# Altium PCB SPDIF_I2S_SPDIF_04-20-23.PcbDoc (part 2 of 2)
Units mil, origin at the board's own origin, x right, y up, seen from the top; angles counter-clockwise.
Board outline 3987 x 3094 mil, 2 copper layers (Top Layer, Bottom Layer); 173 components, 89 nets, 568 pads, 369 vias.
Unrouted connection lines stored in the file: 53.
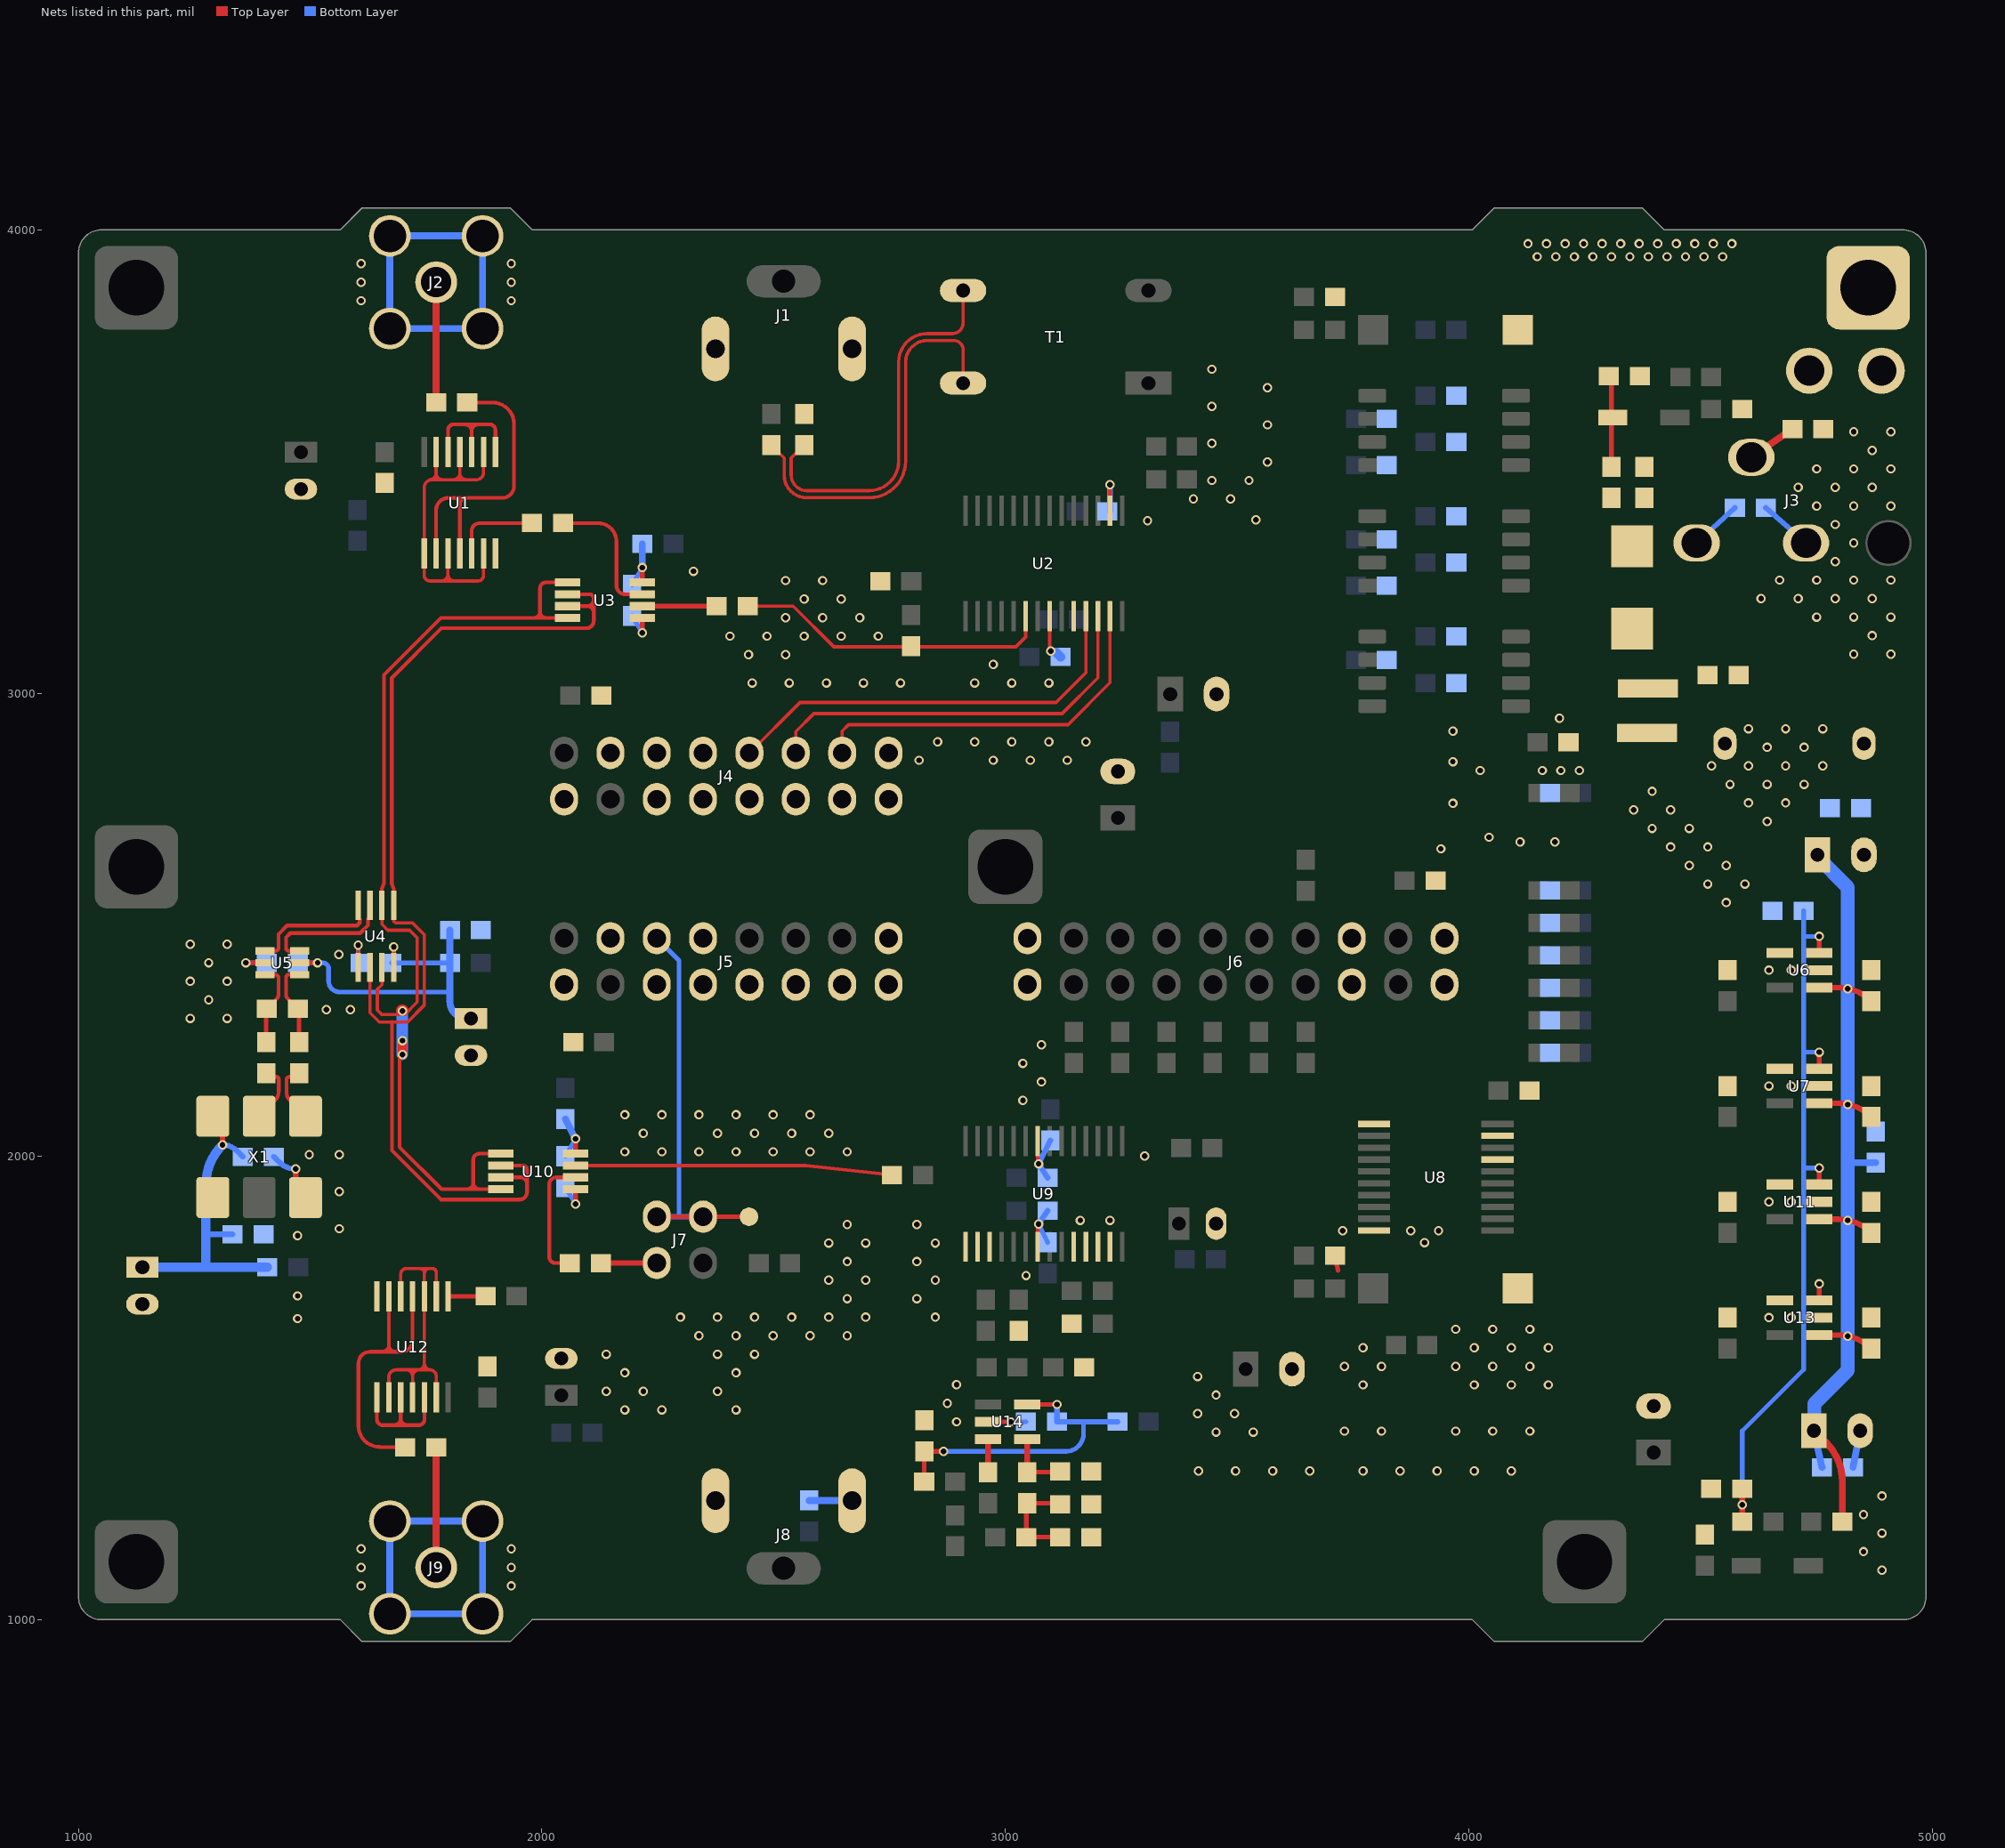
[diagram p2: the nets of this part, all layers, seen from the top]

## Via types
v1: diameter 20, hole 12, Top Layer to Bottom Layer, tented both sides, 364 vias
v2: diameter 20, hole 12, Top Layer to Bottom Layer, 5 vias

## Nets (pads, with @x,y where several pads share a name; then routed paths per layer and width w, separated by ;. In a path a pad name is that pad's centre, name@x,y a point inside that pad or via, vN(x,y) a via of type N, cw(c..) or ccw(c..) an arc to the next point about the centre after c; other vN are vias at no path point) (continued)
GND: "U1.7 GND" "U2.8 DGND" "U2.10 FMT1" "U2.16 DGND" "U3.5 GND" "U4.5 Vee" "U5.2 Vee" "U6.2 GND" "U7.2 GND" "U8.1 /OE_1" "U8.10 GND" "U8.17 2A4" "U8.19 /OE_2" "U9.1 RXP3" "U9.2 RXP2" "U9.3 RXP1" "U9.7 AGND" "U9.10 RXP4" "U9.11 RXP5" "U9.12 RXP6" "U9.13 RXP7" "U9.22 DGND" "U10.5 GND" "U11.2 GND" "U12.7 GND" "U13.2 GND" "U14.2 V-" "X1.3 GND" C1.2 C2.1 C3.2 C4.2 C5.1 C6.1 C8.1 C9.2 C10.1 C11.1 C12.2 C13.1 C14.2 C15.2 C16.1 C17.1 C18.1 C19.2 C20.1 C21.1 C22.1 C23.1 C24.2 C25.1 C26.1 C27.2 C28.2 C31.1 C32.1 C33.1 C34.2 C35.2 C36.1 C37.1 C38.2 C39.2 C40.1 C41.1 C42.1 C43.1 C45.1 C46.1 C47.1 C48.1 C49.1 C50.1 C51.1 C52.2 C53.1 C54.1 C55.1 C56.1 C57.1 C58.1 C59.1 C60.1 C61.1 C62.1 C63.1 J1.2 J1.3 J2.2 J3.2 J4.1 J4.4 J4.5 J4.6 J4.7 J4.8 J4.9 J4.11 J4.13 J4.15 J4.16 J5.1 J5.4 J5.5 J5.7 J5.8 J5.9 J5.11 J5.13 J5.15 J5.16 J6.1 J6.2 J6.15 J6.16 J6.19 J6.20 J8.2 J8.3 J9.2 pad.0@4862,3875 pad.1 R3.1 R5.1 R26.2 R36.1 R38.1 R40.1 R41.1 R42.1 R43.1 R44.1 R45.1 R46.1 R47.1 R48.1 R49.1 R50.1 R51.1 R52.1 R53.1 R54.1 R55.1 R56.1 R57.1 R58.1 SW1.2 SW2.2 | length 2920.8
  Top Layer w8: 1603.63,2401.1 1603.63,2408.1 v1(1603.63,2456.2) ; 3070,1805 v2@3070,1854 ; v2@3070,1984 3070,2033 ; v1@3096,3092 3096,3166 ; 3226,3394 v1(3226,3450)
  Top Layer w10: v1(1361,2418) 1402.6,2418 ; v1(2072.71,1897.18) 2072.71,1929.2 ; v1(2216.71,3130.18) 2216.71,3162.2 ; 2962.68,1427.29 v1(3012,1427.29) ; C28.2@3711.47,1786 3718,1754
  Top Layer w12: 1469,1911.32 v1(1469,1973)
  Bottom Layer w10: v1(1361,2418) C52.2@1406.54,2418 ; C53.1@1603.63,2417.66 v1(1603.63,2456.2) ; C57.1@2051,1933.54 v1(2072.71,1897.18) ; C47.1@2195,3166.53 v1(2216.71,3130.18) ; v1(3012,1427.29) C62.1@3044.53,1427.29 ; v2(3072,1854) C61.1@3091.47,1814.46
  Bottom Layer w12: C56.1@1421.46,1999.46 1433.03,1987.9 ccw(c1469,2023.87) v1(1469,1973) ; v2(3072,1854) C59.1@3091.47,1883 ; C58.1@3091.47,1954 v2(3072,1984) C54.1@3097.47,2034.54 ; C46.1@3226,3392 v1(3226,3450) ; C45.1@4641.47,3400 J3.2@4728,3324
  Bottom Layer w15: R58.1@2577,1257.46 J8.3@2669.03,1257.46 ; C63.1@4829.47,1329 C39.2@4845,1408 ; J9.2@1672,1013 J9.2@1672,1213 J9.2@1872,1213 J9.2@1872,1013 J9.2@1672,1013 ; J2.2@1672,3787 J2.2@1672,3987 J2.2@1872,3987 J2.2@1872,3787 J2.2@1672,3787
  Bottom Layer w20: C48.1@3109.78,3087.68 C48.1@3119.47,3078
  other v1: 1610,1073 1934,1073 4892,1107 1610,1113 1934,1113 4852,1147 1610,1153 1934,1153 4892,1187 4852,1227 4892,1267 3417,1321 3497,1321 3577,1321 3657,1321 3772,1321 3852,1321 3932,1321 4012,1321 4092,1321 3455,1405 3535,1405 3732,1407 3812,1407 3972,1407 4052,1407 4132,1407 2895,1427.29 3415,1445 3495,1445 2179,1453 2259,1453 2419,1453 2875,1467.29 3455,1485 2139,1493 2219,1493 2379,1493 2895,1507.29 3772,1507 4012,1507 4092,1507 4172,1507 3415,1525 2179,1533 2419,1533 3732,1547 3812,1547 3972,1547 4052,1547 4132,1547 2139,1573 2379,1573 2459,1573 3772,1587 4012,1587 4092,1587 4172,1587 2339,1613 2419,1613 2499,1613 2579,1613 2659,1613 3972,1627 4052,1627 4132,1627 1473,1650 4648,1652 4696,1652 2299,1653 2379,1653 2459,1653 2539,1653 2619,1653 2699,1653 2849,1653 2659,1693 2809,1693 1473,1699 2619,1733 2699,1733 2849,1733 3045,1743 2659,1773 2809,1773 2619,1813 2699,1813 2849,1813 3905,1814 1473,1829 3728,1839.84 3875,1839.84 3935,1839.84 1563,1844 2659,1853 2809,1853 3162,1862 3226,1862 4648,1902 4696,1902 1563,1924 3301,2001 1498,2004 1563,2004 2179,2010 2259,2010 2339,2010 2419,2010 2499,2010 2579,2010 2659,2010 2219,2050 2379,2050 2459,2050 2539,2050 2619,2050 2179,2090 2259,2090 2339,2090 2419,2090 2499,2090 2579,2090 3038,2121 4648,2152 4696,2152 3078,2161 3038,2201 3078,2241 1241,2298 1321,2298 1535,2317 1587,2317 1281,2338 1241,2378 1321,2378 4648,2402 4696,2402 1281,2418 1562,2436 1241,2458 1321,2458 4556,2548 4516,2588 4596,2588 4476,2628 4556,2628 3940,2664 4436,2668 4516,2668 4111,2679 4186,2679 4044,2689 4396,2708 4476,2708 4356,2748 4436,2748 3966,2762 4396,2788 4025,2833 4159,2833 4199,2833 4239,2833 3966,2852 2814,2855 2974,2855 3054,2855 3134,2855 2854,2895 2934,2895 3014,2895 3094,2895 3174,2895 3966,2918 4196,2946 2454,3022 2534,3022 2614,3022 2694,3022 2774,3022 2934,3022 3014,3022 3094,3022 2974,3062 2446,3083 2526,3083 4831,3084 4911,3084 3098,3091 2406,3123 2486,3123 2566,3123 2646,3123 2726,3123 4871,3124 2526,3163 2606,3163 2686,3163 4751,3164 4831,3164 4911,3164 2566,3203 2646,3203 4631,3204 4711,3204 4791,3204 4871,3204 2526,3243 2606,3243 4671,3244 4751,3244 4831,3244 4911,3244 2327,3263 4791,3284 4831,3324 4791,3364 3307,3372 3541,3374 4751,3404 4831,3404 4911,3404 3406,3419 3486,3419 4711,3444 4791,3444 4871,3444 3446,3459 3526,3459 4751,3484 4831,3484 4911,3484 3566,3499 4871,3524 3446,3539 4831,3564 4911,3564 3566,3579 3446,3619 3566,3659 3446,3699 1610,3847 1934,3847 1610,3887 1934,3887 1610,3927 1934,3927 4148,3942 4188,3942 4228,3942 4268,3942 4308,3942 4348,3942 4388,3942 4428,3942 4468,3942 4508,3942 4548,3942 4128,3970 4168,3970 4208,3970 4248,3970 4288,3970 4328,3970 4368,3970 4408,3970 4448,3970 4488,3970 4528,3970 4568,3970
I2C_SCL: 
I2C_SDA: 
I2S_BCLK: 
I2S_Data: 
I2S_RCVR_BCLK: 
I2S_RCVR_DATA: 
I2S_RCVR_LRCK: 
I2S_WCLK: 
I2S_XMTR_BCLK: "U2.11 SCLK" J4.10 | length 919.7
  Top Layer w7: J4.10@2448,2871 2557,2980 3110,2980 3174,3044 3174,3166
I2S_XMTR_DATA: "U2.13 DATA" J4.14 | length 811.8
  Top Layer w7: J4.14@2648,2871 2648,2918 2662,2932 3135.54,2932 3226,3022.46 3226,3166
I2S_XMTR_LRCK: "U2.12 SYNC" J4.12 | length 878.9
  Top Layer w7: J4.12@2548,2871 2548,2917 2587,2956 3122.77,2956 3200,3033.23 3200,3166
LMV_3V3: "U14.5 V+" C40.2 C62.2 L5.2 R30.1 | length 689.2
  Top Layer w10: R30.1@2825.07,1298 C40.2@2825.07,1363.3 v1(2867,1363.3) ; 3047.32,1464.69 v1(3111.47,1464.69)
  Bottom Layer w10: v1(2867,1363.3) 3130.86,1363.3 ccw(c3130.86,1401.45) 3169,1401.45 3169,1427
  Bottom Layer w12: v1(3111.47,1464.69) C62.2@3111.47,1427.29 3169,1427.29 L5.2@3242.53,1427.29
LMV_Offset: "U14.4 In-" C41.2 R32.2 | length 142.6
  Top Layer w10: R32.2@3047.32,1318.46 C41.2@3118.53,1318.46
  Top Layer w12: R32.2@3047.32,1318.46 3047.32,1389.89
LMV_OffsetFilter: C43.2 R32.1 R37.1 R38.2 | length 217.5
  Top Layer w10: R32.1@3045.47,1251.54 R37.1@3045.47,1178.32 R38.2@3118.53,1178.32 ; R32.1@3047.32,1251.54 C43.2@3118.53,1251.54
LMV_Sig_In: "U14.3 In+" R31.2 | length 70.4
  Top Layer w12: R31.2@2962.68,1319.46 2962.68,1389.89
LVDS_3V3: "U3.8 Vcc" "U10.8 Vcc" C47.2 C57.2 L7.2 L9.2 | length 249.5
  Top Layer w10: 2072.71,2005.98 v1(2072.71,2038) ; 2216.71,3238.98 v1(2216.71,3271)
  Bottom Layer w10: C57.2@2051,2000.46 v1(2072.71,2038) ; C47.2@2195,3233.47 v1(2216.71,3271)
  Bottom Layer w15: L9.2@2051,2080.53 v1(2072.71,2038) ; v1(2216.71,3271) L7.2@2216.71,3322
MCLK: "U2.6 MCLK" "U3.6 Q1" "U10.7 Q0" J5.6 J7.1 J7.3 pad.2 R9.1 R9.2 R10.1 R21.1 | length 2454.2
  Top Layer w7: R9.2@2444.47,3187.8 2542.2,3187.8 2630,3100 3023,3100 3044,3121 3044,3166
  Top Layer w8: 2072.71,1980.39 2569.61,1980.39 R21.1@2755.53,1960
  Top Layer w10: 2216.71,3187.8 R9.1@2377.53,3187.8 ; J7.3@2248,1870 J7.1@2348,1870 pad.2@2447,1870
  Bottom Layer w10: J5.6@2248,2471 2296,2423 2296,1870
  Bottom Layer w12: J7.3@2248,1870 2296,1870 J7.1@2348,1870
MCLK_LVDS_H: "U3.1 D0" "U3.4 D1" "U4.2 /D" "U4.7 Q" "U10.1 D0" "U10.4 D1" | length 2371.2
  Top Layer w7: 1654.79,2408.1 1654.79,2370.79 1645,2361 1645,2316 1655,2306 1704,2306 1731,2333 1731,2472 1714.79,2488.21 1667.79,2488.21 1654.79,2501.21 1654.79,2541.9
  Top Layer w8: 1654.79,2541.9 1654.79,2577 1659.5,2590 1659.5,3039.5 1782.2,3162.2 1982.2,3162.2 ; v1@1693,2251 1693,2020 1783.8,1929.2 1911.29,1929.2 ; 1838.2,1929.2 ccw(c1838.2,1943) 1852,1943 ccw(c1865.8,1943) 1865.8,1929.2 ; 1852,1929.2 1852,1993.11 cw(c1864.87,1993.11) 1864.87,2005.98 1911.29,2005.98 ; 2055.29,3162.2 2009.8,3162.2 ; 2055.29,3238.98 2008.87,3238.98 ccw(c2008.87,3226.11) 1996,3226.11 1996,3162.2 ; 1982.2,3162.2 ccw(c1982.2,3176) 1996,3176 ccw(c2009.8,3176) 2009.8,3162.2 ; 1982.2,3162.2 1996,3162.2 ; 1996,3162.2 2009.8,3162.2
  Top Layer w20: v1(1699,2220) v1(1699,2250)
  Top Layer w25: v1@1698,2315 v1@1700,2315
  Bottom Layer w25: v1(1699,2220) v1(1699,2314)
MCLK_LVDS_L: "U3.2 /D0" "U3.3 /D1" "U4.1 D" "U4.6 /Q" "U10.2 /D0" "U10.3 /D1" | length 2525.5
  Top Layer w7: 1629.21,2408.1 1629.21,2310.05 1649.05,2290.21 1710.21,2290.21 1746,2326 1746,2479 1721,2504 1684,2504 1680.38,2507.62 1680.38,2541.9
  Top Layer w8: 1676.41,2290 1676.41,2013.13 1782.54,1907 1952,1907 ccw(c1952,1923) 1968,1923 1968,1971.18 ccw(c1958.8,1971.18) 1958.8,1980.39 1911.29,1980.39 ; 1680.38,2541.9 1680.38,2577 1676.09,2590 1676.09,3032.63 1783.46,3140 2096,3140 ccw(c2096,3156) 2112,3156 2112,3204.18 ccw(c2102.8,3204.18) 2102.8,3213.39 2055.29,3213.39 ; 1911.29,1954.8 1968,1954.8 ; 1967.8,1941 ccw(c1954,1941) 1954,1954.8 ccw(c1954,1968.59) 1967.8,1968.59 ; 2055.29,3187.8 2112,3187.8 ; 2111.8,3174 ccw(c2098,3174) 2098,3187.8 ccw(c2098,3201.59) 2111.8,3201.59
MCLK_Out_Buffer: "U1.1 1A" "U1.3 2A" "U1.6 3Y" "U1.9 4A" "U1.11 5A" "U1.13 6A" "U12.2 1Y" "U12.3 2A" "U12.5 3A" "U12.9 4A" "U12.11 5A" "U12.13 6A" | length 1670.8
  Top Layer w7: 1669.82,1479.75 1669.82,1523.58 cw(c1685.74,1523.58) 1685.74,1539.5 1758.18,1539.5 ; 1695.41,1698.25 1695.41,1745.82 cw(c1707.59,1745.82) 1707.59,1758 1763.93,1758 cw(c1763.93,1749.75) 1772.18,1749.75 1772.18,1698.25 ; 1707.2,1539.3 cw(c1707.2,1525.5) 1721,1525.5 cw(c1734.8,1525.5) 1734.8,1539.3 ; 1721,1479.75 1721,1539.5 ; 1732.8,1539.2 ccw(c1732.8,1553) 1746.59,1553 ccw(c1760.39,1553) 1760.39,1539.2 ; 1736.59,1758 cw(c1736.59,1748) 1746.59,1748 cw(c1756.59,1748) 1756.59,1758 ; 1746.59,1540 1746.59,1698.25 1746.59,1758 ; 1758.02,3460.7 ccw(c1758.02,3474.5) 1771.82,3474.5 ccw(c1785.61,3474.5) 1785.61,3460.7 ; 1758.39,1539.3 cw(c1758.39,1525.5) 1772.18,1525.5 1772.18,1479.75 ; 1771.82,3460.5 1771.82,3520.25 ; 1783.61,3242.2 ccw(c1783.61,3256) 1797.41,3256 ccw(c1811.2,3256) 1811.2,3242.2 ; 1797.41,3242 1797.41,3301.75 ; 1809.2,3460.7 ccw(c1809.2,3474.5) 1823,3474.5 ccw(c1836.8,3474.5) 1836.8,3460.7 ; 1823,3460.5 1823,3520.25 ; 1874.18,3301.75 1874.18,3254.18 cw(c1862,3254.18) 1862,3242 1758.41,3242 cw(c1758.41,3254.18) 1746.23,3254.18 1746.23,3301.75 1746.23,3444 cw(c1762.73,3444) 1762.73,3460.5 1858.26,3460.5 ccw(c1858.26,3476.42) 1874.18,3476.42 1874.18,3520.25
MCLK_Output: "U1.5 3A" "U3.7 Q0" "U10.6 Q1" "U12.1 1A" J7.4 R8.1 R8.2 R22.1 R22.2 R25.1 | length 962.8
  Top Layer w8: 1848.59,3301.75 1848.59,3349.59 cw(c1866,3349.59) 1866,3367 R8.1@1978.54,3367 ; R8.2@2045.46,3367 2121,3367 cw(c2121,3327) 2161,3327 2161,3232 ccw(c2179.61,3232) 2179.61,3213.39 2216.71,3213.39 ; R22.2@2060.53,1770 2029,1770 cw(c2029,1783) 2016,1783 2016,1940 cw(c2030.8,1940) 2030.8,1954.8 2072.71,1954.8
  Top Layer w10: 1797.77,1698.25 R25.1@1878.54,1698.25
  Top Layer w12: R22.1@2127.47,1770 J7.4@2248,1770
MCLK_SMA_Out: "U1.2 1Y" "U1.4 2Y" "U1.8 4Y" "U1.10 5Y" "U1.12 6Y" "U12.4 2Y" "U12.6 3Y" "U12.8 4Y" "U12.10 5Y" "U12.12 6Y" J2.1 J9.1 R2.1 R2.2 R29.1 R29.2 | length 2520.5
  Top Layer w7: 1656.02,1579.2 ccw(c1656.02,1593) 1669.82,1593 ccw(c1683.61,1593) 1683.61,1579.2
  Top Layer w8: 1644.23,1479.75 1644.23,1432.18 ccw(c1656.41,1432.18) 1656.41,1420 1734.41,1420 ccw(c1734.41,1432.18) 1746.59,1432.18 1746.59,1479.75 ; 1669.82,1578.5 1669.82,1698.25 ; 1681.61,1420.2 ccw(c1681.61,1434) 1695.41,1434 ccw(c1709.2,1434) 1709.2,1420.2 ; 1695.41,1420 1695.41,1479.75 ; R29.2@1705.07,1372.2 1650,1373 cw(c1650,1418.77) 1604.23,1418.77 1604.23,1553.38 cw(c1629.35,1553.38) 1629.35,1578.5 1698,1578.5 ccw(c1698,1601.5) 1721,1601.5 1721,1698.25 ; 1771.82,3301.75 1771.82,3394.9 cw(c1798.42,3394.9) 1798.42,3421.5 1914.65,3421.5 ccw(c1914.65,3446.62) 1939.77,3446.62 1939.77,3581.23 ccw(c1894,3581.23) 1894,3627 R2.2@1839.73,3627 ; 1797.41,3520.25 1797.41,3567.82 cw(c1809.59,3567.82) 1809.59,3580 1887.59,3580 cw(c1887.59,3567.82) 1899.77,3567.82 1899.77,3520.25 ; 1809.21,3421.29 cw(c1809.21,3407.5) 1823,3407.5 cw(c1836.8,3407.5) 1836.8,3421.29 ; 1823,3301.75 1823,3421.5 ; 1834.8,3579.8 cw(c1834.8,3566) 1848.59,3566 cw(c1862.39,3566) 1862.39,3579.8 ; 1848.59,3520.25 1848.59,3580
  Top Layer w15: J9.1@1772,1113 R29.1@1772,1372.2 ; R2.1@1772,3627.8 J2.1@1772,3880
MIC_Enable: "U6.3 EN" "U7.3 EN" "U11.3 EN" "U13.3 EN" C42.2 C50.2 R34.1 | length 1649.8
  Top Layer w10: 4756.32,1689.4 v1(4756.32,1725) ; 4756.32,1939.4 v1(4756.32,1975) ; 4756.32,2189.4 v1(4756.32,2225) ; 4756.32,2439.4 v1(4756.32,2475)
  Top Layer w12: R34.1@4590.53,1212 C42.2@4590.53,1282.54
  Bottom Layer w10: v1(4590.53,1248) 4590.53,1407.54 4723,1540 C50.2@4723,2530 ; 4723,1975 v1(4756.32,1975) ; 4723,2225 v1(4756.32,2225) ; 4723,2475 v1(4756.32,2475)
MIC_Flag: "U6.4 FLG" "U7.4 FLG" "U11.4 FLG" "U13.4 FLG"
PWR_Input_Switch: J3.3 R5.2 | length 107.5
  Top Layer w15: J3.3@4610,3509 R5.2@4698.53,3570
PWR_Input_V+: "U6.1 In" "U7.1 In" "U11.1 In" "U13.1 In" C2.2 C6.2 C10.2 C12.1 C15.1 C18.2 C22.2 C26.2 C33.2 C39.1 C45.2 C49.2 C55.2 C63.2 D2.1 D3.1 D3.2 J3.1 L2.1 L2.2 R7.1 R7.2 R35.2 | length 2442.2
  Top Layer w10: R7.1@4308,3488.47 C2.2@4308,3683
  Top Layer w12: 4756.32,1614.6 4797.71,1614.6 cw(c4797.71,1513.78) C33.2@4869,1585.07 ; 4756.32,1864.6 4797.71,1864.6 cw(c4797.71,1763.78) C26.2@4869,1835.07 ; 4756.32,2114.6 4797.71,2114.6 cw(c4797.71,2013.78) C22.2@4869,2085.07 ; 4756.32,2364.6 4797.71,2364.6 cw(c4797.71,2263.78) C18.2@4869,2335.07
  Top Layer w15: C39.1@4746,1408 4771.11,1382.89 cw(c4685.75,1297.54) 4806.47,1297.54 R35.2@4806.47,1212
  Bottom Layer w12: J3.1@4492,3324 C45.2@4574.53,3400
  Bottom Layer w15: C39.1@4745,1408 C63.2@4762.53,1329 ; 4817,1986.54 C55.2@4878,1986.54
  Bottom Layer w30: C39.1@4746,1408 4746,1466 4818,1538 4818,2581 C15.1@4752.5,2646.5
  other v1: 4818,1612 4818,1862 4818,2112 4818,2362 4644,2723 4604,2763 4684,2763 4564,2803 4644,2803 4724,2803 4524,2843 4604,2843 4684,2843 4764,2843 4644,2883 4724,2883 4604,2923 4684,2923 4764,2923
SPDIF_In: 
SPDIF_In_DCRef: 
XMTR_TransOut_H: R4.1 T1.3 | length 859.2
  Top Layer w7: R4.1@2495,3535.53 2523,3507.53 2523,3470.16 ccw(c2571.16,3470.16) 2571.16,3422 2706.49,3422 ccw(c2706.49,3500.51) 2785,3500.51 2785,3714.52 cw(c2831.48,3714.52) 2831.48,3761 2889,3761 cw(c2889,3741) 2909,3741 T1.3@2909,3669
XMTR_TransOut_L: C3.1 T1.4 | length 834.9
  Top Layer w7: C3.1@2566,3535.53 2538,3507.53 2538,3471.05 ccw(c2572.05,3471.05) 2572.05,3437 2706.11,3437 ccw(c2706.11,3500.89) 2770,3500.89 2770,3714.77 cw(c2831.23,3714.77) 2831.23,3776 2886,3776 ccw(c2886,3799) 2909,3799 T1.4@2909,3869
XTAL_3V3: "U4.8 Vcc" "U5.5 Vcc" "X1.6 Vdd" C19.1 C27.1 C51.2 C52.1 C53.2 C56.2 C60.2 L10.2 L12.1 | length 1571.6
  Top Layer w8: 1680.38,2401.1 1680.38,2408.1 v1(1680.38,2452.2) v1@1680.38,2456.2
  Top Layer w10: 1474.46,2418 1477.4,2418 v1(1516.06,2418)
  Top Layer w12: v1(1311,2025) 1311,2086.68
  Bottom Layer w10: v1@1310.36,2024.36 v1(1311,2025) ; C52.1@1473.47,2418 1527,2418 cw(c1527,2405) 1540,2405 1540,2378 ccw(c1563,2378) 1563,2355 1801,2355 ; C53.2@1675.46,2417.66 C53.2@1680.38,2417.66 ; v1@1680.38,2456.2 v1(1680.38,2452.2) C53.2@1680.38,2417.66 ; L10.2@1801.54,2417.66 C53.2@1680.38,2417.66
  Bottom Layer w12: 1275,1832 C60.2@1332.54,1832 ; v1(1311,2025) cw(c1311,1981.54) 1341.73,2012.27 C56.2@1354.54,1999.46
  Bottom Layer w15: C51.2@1801.54,2488.66 L10.2@1801.54,2417.66 1801.54,2355 1801.54,2334.47 ccw(c1838,2334.47) 1838,2298 C19.1@1847,2298
  Bottom Layer w20: C27.1@1138,1761 1275,1761 ; v1@1310.36,2024.36 ccw(c1395.71,1939) 1275,1939 1275,1832 1275,1761 ; L12.1@1407.54,1761 1275,1761
XTal_CLK: 
XTAL_EN: "X1.1 EN"
XTAL_Out_H: "U4.3 CLK" "U5.4 In-" "U5.6 Out-" "X1.4 OUT" R12.2 R20.1 R20.2 | length 595.5
  Top Layer w8: R12.2@1473.46,2319 1451.21,2341.26 cw(c1458.95,2349) 1448,2349 1448,2386.01 cw(c1454.4,2386.01) 1454.4,2392.41 1477.4,2392.41 ; 1477.4,2443.59 1454.4,2443.59 cw(c1454.4,2449.99) 1448,2449.99 1448,2472.8 1457.2,2482 1608,2482 1625,2499 1625,2512 1629.21,2516.21 1629.21,2541.9 ; R20.2@1477.8,2172 1455.8,2172 ccw(c1455.8,2165) 1448.8,2165 1448.8,2141 ccw(c1480.49,2141) 1458.08,2118.59 1490,2086.68
  Top Layer w10: R20.1@1476,2246.47 R12.2@1476,2316.47
XTAL_Out_L: "U4.4 /CLK" "U5.1 Out+" "U5.3 In+" "X1.5 /OUT" R12.1 R19.1 R19.2 | length 593.8
  Top Layer w8: 1390,2086.68 1423.97,2120.65 ccw(c1403.62,2141) 1432.4,2141 1432.4,2165.6 ccw(c1426,2165.6) 1426,2172 R19.2@1403,2172 ; 1402.6,2392.41 1424.6,2392.41 cw(c1424.6,2385.41) 1431.6,2385.41 1431.6,2349 cw(c1419.68,2349) 1428.11,2340.57 R12.1@1406.54,2319 ; 1402.6,2443.59 1424.6,2443.59 ccw(c1424.6,2450.59) 1431.6,2450.59 1431.6,2479.6 1450.4,2498.4 1601.21,2498.4 1607,2504.2 1607,2511 1603.63,2514.37 1603.63,2541.9
  Top Layer w10: R19.1@1405,2246.47 R12.1@1405,2316
pads on no net: "U8.3 2Y4" "X1.2 NC" C8.2 C29.1 C37.2 D1.1 D1.2 D2.2 D4.2 D5.2 D6.2 D7.2 D8.2 D9.2 D10.2 D11.1 D11.2 J3.0 J6.4 J6.6 J6.8 J6.10 J6.12 R3.2 R10.2 R26.1 R28.1 R34.2 R35.1 R36.2 R51.2 R52.2 R53.2 R54.2 R55.2 R56.2 R57.2 SW5.8
copper on no net: | length 1359
  Top Layer w10: 4454.93,3594 4454.93,3681 ; 4509.53,1117 4599.07,1117 4607.47,1117 ccw(c4607.47,1167) 4657.47,1167 4657.47,1212 ; 4523.53,3613 4523.53,3682 ; 4736,1117 4736,1211.54
  Top Layer w12: 2797.2,3168.47 2797.2,3241.8 ; 3026.47,1545 3111,1545 ; 3210.47,1639 3210.47,1709.68 ; 4217.47,2224 v1(4277,2224) ; 4217.47,2294 v1(4277,2294) ; 4217.47,2364 v1(4277,2364) ; 4217.47,2434 v1(4277,2434) ; 4217.47,2504 v1(4277,2504) ; 4217.47,2574 v1(4277,2574) ; 4217.47,2784 v1(4277,2784)
  Bottom Layer w12: 4242.47,2224 v1(4277,2224) ; 4242.47,2294 v1(4277,2294) ; 4242.47,2364 v1(4277,2364) ; 4242.47,2434 v1(4277,2434) ; 4242.47,2504 v1(4277,2504) ; 4242.47,2574 v1(4277,2574) ; 4242.47,2784 v1(4277,2784)

## Polygon pours and split planes (outlines as drawn)
GND on Top Layer "r" (solid, remove dead copper, pour order 0): 2924,1360 2924,1152.13 ccw(c2954.13,1152.13) 2954.13,1122 3360,1122 ccw(c3360,1148) 3386,1148 3386,1285 4082.1,1285 ccw(c4082.1,1328.21) 4112.66,1297.66 4193.22,1378.22 ccw(c4157.55,1413.89) 4208,1413.9 4208,1792 4244,1792 ccw(c4244,1866) 4318,1866 4318,2525 4318,2822 4388.44,2822 cw(c4388.45,2748.25) 4440.61,2800.39 4619,2622 4619,2518 4530,2518 ccw(c4530,2487) 4499,2487 4499,1792 4499,1385 4447,1333 4447,1000 3979,1000 2924,1000 2140,1000 2140,1360
GND on Top Layer "r" (solid, remove dead copper, pour order 24): 2935,1149 2935,1370 2833,1370 2781,1370 2781,1581 3255,1581 3377,1581 3377,1152 cw(c3355,1152) 3355,1130 2954,1130 cw(c2954,1149)
GND on Top Layer "r" (solid, remove dead copper, pour order 2): 2259,4000 2995,4000 4592,4000 4592,3952 cw(c4559,3952) 4559,3919 3163.38,3919 ccw(c3163.38,3835.99) 3104.69,3894.69 3015.31,3805.31 ccw(c3064.35,3756.27) 2995,3756.27 2995,3677.42 cw(c2895.05,3677.4) 2965.71,3606.71 2820,3461 2778.29,3419.29 cw(c2707.59,3489.97) 2707.58,3390 2592,3390 2384,3390 2259,3515
GND on Top Layer "XMTR TOP" (solid, remove dead copper, pour order 28): 3003,3742.61 3003,3716 3003,3655.14 cw(c2939.91,3655.13) 2984.51,3610.51 2916,3542 2775.78,3401.78 cw(c2728.04,3449.51) 2728.03,3382 2635,3382 2384,3382 2384,3198 2384,3107 cw(c2360,3107) 2360,3083 2206,3083 2206,2782 2206,2647 3915,2647 3915,3910 3175.8,3910 ccw(c3175.8,3811.5) 3106.15,3881.15 3028.02,3803.02 ccw(c3088.42,3742.62)
GND on Top Layer "CLK GND" (solid, remove dead copper, pour order 60): 2055,1823 2004,1823 2004,1839 2004,2144 2156,2144 2530.72,2144 cw(c2530.72,2032.27) 2609.73,2111.27 2770,1951 2770,1368 2275,1368 2120,1368 2120,1823
GND on Top Layer "r" (solid, remove dead copper, pour order 50): 1534,2280 1214,2280 1214,3014 1396,3196 1883.69,3196 ccw(c1883.69,3249.87) 1921.78,3211.78 1988.93,3278.93 ccw(c1950.13,3317.73) 2005,3317.73 2005,3515 2140,3515 2140,3304 2140,3092 2057.73,3092 ccw(c2057.7,3039.6) 2020.64,3076.64 1977.95,3033.95 ccw(c1997.11,3014.77) 1970,3014.76 1970,2172 1995,2147 1995,2077 1995,1823 1970,1823 1790,1823 1605,1823 1605,2239 1605,2258 ccw(c1583.01,2258.01) 1583,2280 1558,2280
GND on Top Layer "RCVR TOP" (solid, remove dead copper, pour order 26): 3119,1589 2781,1589 2781,1644 2781,1912.58 ccw(c2681.02,1912.58) 2751.71,1983.29 2619,2116 ccw(c2529.68,2026.68) 2529.67,2153 2206,2153 2206,2637 3699,2637 3699,1866 3699,1589 3137,1589
GND on Top Layer "LED GND" (solid, remove dead copper, pour order 66): 3708,1841 3708,2230 3731,2230 4007,2230 4007,2592 4007,2638 4131,2638 4310,2638 4310,1870 cw(c4240,1870) 4240,1800 3776,1800 3708,1800 3708,1831
GND on Top Layer "pwr GND" (solid, remove dead copper, pour order 54): 3708,2637 3998,2637 3998,2238 3708,2238
GND on Top Layer "3v3GND TOP" (solid, remove dead copper, pour order 38): 4897,1760 4538,1760 ccw(c4538,1729) 4507,1729 4507,1561 ccw(c4533,1561) 4533,1535 4902,1535 ccw(c4902,1559) 4926,1559 4926,1731 ccw(c4897,1731) 4897,1760
GND on Top Layer "pwr GND" (solid, remove dead copper, pour order 56): 2099,2153 2004,2153 1979,2178 1979,2593 2195,2593 2195,2390 2195,2153 2176,2153
MCLK_SMA_Out on Top Layer "MCLK_SMA_OUT_L01_P073" (solid, remove dead copper, pour order 73): 1830,3576 1887,3576 cw(c1887,3569) 1894,3569 1894,3469 cw(c1871,3469) 1871,3446 1799,3446 ccw(c1799,3415) 1768,3415 1768,3369.86 1823,3369.86 1823,3421 1918,3421 ccw(c1918,3447) 1944,3447 1944,3621 ccw(c1900,3621) 1900,3665 1840,3665 ccw(c1840,3655) 1830,3655
GND on Top Layer "BNC TOP" (solid, remove dead copper, pour order 42): 1978.51,3282.51 1917.19,3221.19 cw(c1878.1,3260.28) 1878.1,3205 1396,3205 1396,3831 1598,4033 1612,4047 1931,4047 1932,4047 1995,3984 1995,3322.31 cw(c1938.72,3322.31)
GND on Top Layer "PWR GND" (solid, remove dead copper, pour order 72): 3386,1581 3386,1295 3699,1295 3699,1581
GND on Top Layer "LED GND" (solid, remove dead copper, pour order 68): 3891,1792 3708,1792 3708,1293 4075.69,1293 ccw(c4075.69,1342.04) 4110.36,1307.36 4181.1,1378.1 ccw(c4135.47,1423.73) 4200,1423.73 4200,1792 3915,1792
GND on Top Layer "CLK GND" (solid, remove dead copper, pour order 62): 2149,3092 2149,3515 2245,3515 2376,3384 2376,3287 2376,3116 cw(c2352,3116) 2352,3092 2161,3092
GND on Top Layer "BNC TOP" (solid, remove dead copper, pour order 46): 1979,1000 1932,953 1612,953 1524,1041 1524,1641 1524,1783 cw(c1553,1783) 1553,1812 2111,1812 2111,1132
MCLK_SMA_Out on Top Layer "BNC TOP" (solid, remove dead copper, pour order 44): 1720,1420 1720,1342 cw(c1708,1342) 1708,1330 1677,1330 cw(c1677,1430) 1577,1430 1577,1591 cw(c1605,1591) 1605,1619 1609,1619 1649,1619 ccw(c1649,1636) 1666,1636 1674,1636 ccw(c1691,1636) 1691,1619 1700,1619 ccw(c1700,1636) 1717,1636 1725,1636 1725,1585 cw(c1705,1585) 1705,1565 1667,1565 ccw(c1667,1542) 1644,1542 1644,1428 ccw(c1652,1428) 1652,1420
PWR_Input_V+ on Top Layer "PWR_Input_V+" (solid, remove dead copper, pour order 20): 4355,2961 4290,2961 4290,2858 4318,2830 4389.62,2830 cw(c4389.62,2749.42) 4446.6,2806.4 4656.51,2596.49 ccw(c4696.31,2636.29) 4696.31,2580 4804,2580 4804,2920 ccw(c4763,2920) 4763,2961 4386,2961
PWR_Input_V+ on Top Layer "PWR_Input_V+" (solid, remove dead copper, pour order 18): 4397,3225 4245,3225 4245,3029.49 ccw(c4282.38,3029.48) 4255.95,3003.05 4290,2969 4478,2969 4544,2969 4544,3141 4544,3225 4401,3225
PWR_Input_V+ on Top Layer "PWR_Input_V+" (solid, remove dead copper, pour order 16): 4533,3233 4245,3233 4245,3450 4512.69,3450 cw(c4512.69,3410.62) 4540.54,3438.46 4597.17,3381.83 cw(c4568.63,3353.28) 4609,3353.27 4609,3275 cw(c4567,3275) 4567,3233
3.3V on Top Layer "3v3 switches TOP" (solid, remove dead copper, pour order 14): 4147,3719 4056,3719 ccw(c4056,3695) 4032,3695 4032,2884 ccw(c4066,2884) 4066,2850 4138,2850 ccw(c4138,2882) 4170,2882 4170,3696 ccw(c4147,3696)
GND on Top Layer "InputGND TOP" (solid, remove dead copper, pour order 30): 4813,2625 4813,2580 4987,2580 4987,3949 ccw(c4936,3949) 4936,4000 4747,4000 4601,4000 4601,3947.33 cw(c4563.67,3947.33) 4563.67,3910 4245,3910 4245,3586 4245,3458 4383,3458 4522.34,3458 cw(c4522.35,3429.87) 4542.24,3449.76 4561,3431 4609.05,3382.95 cw(c4587.45,3361.35) 4618,3361.34 4618,3268 cw(c4575,3268) 4575,3225 4553,3225 4553,3205 4553,2969 4574,2969 4772,2969 cw(c4772,2928) 4813,2928 4813,2632
GND on Top Layer "3v3GND TOP" (solid, remove dead copper, pour order 32): 4897,2510 4538,2510 ccw(c4538,2479) 4507,2479 4507,2311 ccw(c4533,2311) 4533,2285 4902,2285 ccw(c4902,2309) 4926,2309 4926,2481 ccw(c4897,2481) 4897,2510
GND on Top Layer "3v3GND TOP" (solid, remove dead copper, pour order 34): 4897,2260 4538,2260 ccw(c4538,2229) 4507,2229 4507,2061 ccw(c4533,2061) 4533,2035 4902,2035 ccw(c4902,2059) 4926,2059 4926,2231 ccw(c4897,2231) 4897,2260
GND on Top Layer "3v3GND TOP" (solid, remove dead copper, pour order 36): 4897,2010 4538,2010 ccw(c4538,1979) 4507,1979 4507,1811 ccw(c4533,1811) 4533,1785 4902,1785 ccw(c4902,1809) 4926,1809 4926,1981 ccw(c4897,1981) 4897,2010
GND on Top Layer "3v3GND TOP" (solid, remove dead copper, pour order 40): 4798,1480 4607,1480 4455,1328 4455,1036 4888,1036 ccw(c4888,1073) 4925,1073 4925,1440 ccw(c4885,1440) 4885,1480
GND on Top Layer "XTAL GND" (solid, remove dead copper, pour order 48): 1596,1821 1554,1821 1545,1821 ccw(c1545,1792) 1516,1792 1516,1629 1107,1629 cw(c1107,1661) 1075,1661 1075,2246 cw(c1100,2246) 1100,2271 1576,2271 cw(c1576,2251) 1596,2251
GND on Top Layer "Switch GND" (solid, remove dead copper, pour order 52): 3923,3910 3923,2649 4282,2649 4310,2649 4310,2824 4282,2852 4282,2963 4246.24,2998.76 cw(c4268.56,3021.07) 4237,3021.07 4237,3910
GND on Top Layer "pwr GND" (solid, remove dead copper, pour order 58): 1979,2710 1979,3008.27 cw(c2009.73,3008.27) 1988,3030 2026.15,3068.15 cw(c2062,3032.3) 2062,3083 2197,3083 2197,2603 1979,2603 1979,2699
no net on Top Overlay "TopGND" (solid): 1702.5,2686.5 cw(c1664,2686.49) 1664,2648 1276.5,2648 cw(c1276.5,2686) 1238.5,2686 1238.5,3311.5 cw(c1276,3311.5) 1276,3349 1669.5,3349 cw(c1669.5,3316.01) 1702.5,3316.01 1702.5,3046
GND on Bottom Layer "r" (solid, remove dead copper, pour order 70): 1000,1050 1000,4000 4937,4000 cw(c4937,3950) 4987,3950 4987,1051 cw(c4936,1051) 4936,1000 1050,1000 cw(c1050,1050)
PWR_Input_V+ on Bottom Layer "PWR_Input_V+ BOT" (solid, remove dead copper, pour order 22): 4805,2761 4805,2597 cw(c4788,2597) 4788,2580 4696.31,2580 cw(c4696.31,2636.28) 4656.51,2596.49 4499.29,2753.71 cw(c4570,2824.42) 4470,2824.42 4470,2870 4470,2927 cw(c4504,2927) 4504,2961 4779,2961 cw(c4779,2935) 4805,2935

## Keep-outs
Keep-Out Layer:
  the board outline again, w5

## Other copper
Top Layer:
  rectangle net GND: 4760,3772 4964.82,3977.82
  pour cut-out: 1195,2515 ccw(c1195,2556) 1236,2556 1236,2690 ccw(c1190,2690) 1190,2736 1048,2736 ccw(c1048,2701) 1013,2701 1013,2559 ccw(c1057,2559) 1057,2515
  pour cut-out: 2247,2410 ccw(c2247,2377) 2214,2377 2214,2365 ccw(c2247,2365) 2247,2332 ccw(c2247,2367) 2282,2367 2282,2375 ccw(c2247,2375)
  pour cut-out: 2347,2510 ccw(c2347,2477) 2314,2477 2314,2465 ccw(c2347,2465) 2347,2432 ccw(c2347,2467) 2382,2467 2382,2475 ccw(c2347,2475)
  pour cut-out: 2347,2410 ccw(c2347,2377) 2314,2377 2314,2365 ccw(c2347,2365) 2347,2332 ccw(c2347,2367) 2382,2367 2382,2375 ccw(c2347,2375)
  pour cut-out: 2447,2410 ccw(c2447,2377) 2414,2377 2414,2365 ccw(c2447,2365) 2447,2332 ccw(c2447,2367) 2482,2367 2482,2375 ccw(c2447,2375)
  pour cut-out: 2547,2410 ccw(c2547,2377) 2514,2377 2514,2365 ccw(c2547,2365) 2547,2332 ccw(c2547,2367) 2582,2367 2582,2375 ccw(c2547,2375)
  pour cut-out: 2647,2410 ccw(c2647,2377) 2614,2377 2614,2365 ccw(c2647,2365) 2647,2332 ccw(c2647,2367) 2682,2367 2682,2375 ccw(c2647,2375)
  pour cut-out: 2747,2410 ccw(c2747,2377) 2714,2377 2714,2365 ccw(c2747,2365) 2747,2332 ccw(c2747,2367) 2782,2367 2782,2375 ccw(c2747,2375)
  pour cut-out: 2747,2510 ccw(c2747,2477) 2714,2477 2714,2465 ccw(c2747,2465) 2747,2432 ccw(c2747,2467) 2782,2467 2782,2475 ccw(c2747,2475)
  pour cut-out: 2247,2810 ccw(c2247,2777) 2214,2777 2214,2765 ccw(c2247,2765) 2247,2732 ccw(c2247,2767) 2282,2767 2282,2775 ccw(c2247,2775)
  pour cut-out: 2247,2910 ccw(c2247,2877) 2214,2877 2214,2865 ccw(c2247,2865) 2247,2832 ccw(c2247,2867) 2282,2867 2282,2875 ccw(c2247,2875)
  pour cut-out: 2347,2910 ccw(c2347,2877) 2314,2877 2314,2865 ccw(c2347,2865) 2347,2832 ccw(c2347,2867) 2382,2867 2382,2875 ccw(c2347,2875)
  pour cut-out: 2347,2810 ccw(c2347,2777) 2314,2777 2314,2765 ccw(c2347,2765) 2347,2732 ccw(c2347,2767) 2382,2767 2382,2775 ccw(c2347,2775)
  pour cut-out: 2447,2810 ccw(c2447,2777) 2414,2777 2414,2765 ccw(c2447,2765) 2447,2732 ccw(c2447,2767) 2482,2767 2482,2775 ccw(c2447,2775)
  pour cut-out: 2547,2810 ccw(c2547,2777) 2514,2777 2514,2765 ccw(c2547,2765) 2547,2732 ccw(c2547,2767) 2582,2767 2582,2775 ccw(c2547,2775)
  pour cut-out: 2647,2810 ccw(c2647,2777) 2614,2777 2614,2765 ccw(c2647,2765) 2647,2732 ccw(c2647,2767) 2682,2767 2682,2775 ccw(c2647,2775)
  pour cut-out: 2747,2910 ccw(c2747,2877) 2714,2877 2714,2865 ccw(c2747,2865) 2747,2832 ccw(c2747,2867) 2782,2867 2782,2875 ccw(c2747,2875)
  pour cut-out: 2747,2810 ccw(c2747,2777) 2714,2777 2714,2765 ccw(c2747,2765) 2747,2732 ccw(c2747,2767) 2782,2767 2782,2775 ccw(c2747,2775)
  pour cut-out: 3201,2831 cw(c3233,2831) 3233,2863 3253,2863 cw(c3253,2831) 3285,2831 cw(c3254,2831) 3254,2800 3232,2800 cw(c3232,2831)
  pour cut-out: 1835,2245 ccw(c1835,2218) 1808,2218 ccw(c1835,2218) 1835,2191 1858,2191 ccw(c1858,2219) 1886,2219 ccw(c1860,2219) 1860,2245
  pour cut-out: 3455,1894 ccw(c3455,1867) 3428,1867 3428,1843 ccw(c3455,1843) 3455,1816 ccw(c3455,1843) 3482,1843 3482,1867 ccw(c3455,1867)
  pour cut-out: 4845,1450 ccw(c4845,1418) 4813,1418 4813,1398 ccw(c4845,1398) 4845,1366 ccw(c4845,1398) 4877,1398 4877,1418 ccw(c4845,1418)
  pour cut-out: 3048,2510 cw(c3048,2476) 3082,2476 3082,2466 cw(c3048,2466) 3048,2432 cw(c3048,2466) 3014,2466 3014,2476 cw(c3048,2476)
  pour cut-out: 3048,2410 cw(c3048,2376) 3082,2376 3082,2366 cw(c3048,2366) 3048,2332 cw(c3048,2366) 3014,2366 3014,2376 cw(c3048,2376)
  pour cut-out: 3680,1810 3705,1810 3705,1779 3680,1779
Bottom Layer:
  rectangle net GND: 4755,3766 4964.82,3977.82
  pour cut-out: 2030,1591 ccw(c2030,1564) 2003,1564 ccw(c2030,1564) 2030,1537 2053,1537 ccw(c2053,1565) 2081,1565 ccw(c2055,1565) 2055,1591
  pour cut-out: 1467,3467 ccw(c1467,3441) 1441,3441 ccw(c1469,3441) 1469,3413 1491,3413 ccw(c1491,3441) 1519,3441 ccw(c1493,3441) 1493,3467
  pour cut-out: 4853,2930 cw(c4853,2901) 4882,2901 4882,2881 cw(c4853,2881) 4853,2852 cw(c4853,2881) 4824,2881 4824,2901 cw(c4853,2901)
  pour cut-out: 4852,2693 cw(c4852,2660) 4885,2660 4885,2642 cw(c4852,2642) 4852,2609 cw(c4852,2640) 4821,2640 4821,2662 cw(c4852,2662)
  pour cut-out: 4891,3750 cw(c4891,3696) 4945,3696 cw(c4891,3696) 4891,3642 cw(c4891,3696) 4837,3696 cw(c4891,3696)
  pour cut-out: 4735,3750 cw(c4735,3696) 4789,3696 cw(c4735,3696) 4735,3642 cw(c4735,3696) 4681,3696 cw(c4735,3696)
  pour cut-out: 3098,3109 ccw(c3098,3090) 3079,3090 3079,3089 ccw(c3095,3089) 3095,3073 3101,3073 ccw(c3101,3090) 3118,3090 ccw(c3099,3090) 3099,3109
  pour cut-out: 3455,3039 cw(c3455,3006) 3488,3006 3488,2989 cw(c3455,2989) 3455,2956 cw(c3455,2987) 3424,2987 3424,3008 cw(c3455,3008)
  pour cut-out: 2409,1218 cw(c2374,1218) 2374,1183 cw(c2374,1217) 2340,1217 2340,1296 cw(c2375,1296) 2375,1331 cw(c2375,1297) 2409,1297
  pour cut-out: 1520,1000 1530,1000 1530,1267 cw(c1558,1267) 1558,1295 4440,1295 4440,1304 1557,1304 ccw(c1557,1267) 1520,1267
  pour cut-out: 1502,4000 1502,3637 ccw(c1554,3637) 1554,3585 3040,3585 3196,3741 4019,3741 4019,3750 3187,3750 3033,3596 1556,3596 cw(c1556,3639) 1513,3639 1513,4000
  pour cut-out: 3225,3430 cw(c3225,3450) 3205,3450 cw(c3225,3450) 3225,3470 3227,3470 cw(c3227,3450) 3247,3450 cw(c3227,3450) 3227,3430
  pour cut-out: 1583,2394 1583,2456 cw(c1604,2456) 1604,2477 cw(c1604,2457) 1624,2457 1624,2441 1635,2441 1635,2394
  pour cut-out: 1396,2023 1396,1975 1424,1975 1432.79,1969.67 1444.06,1963.65 1456.28,1959.94 1465.44,1959.04 1469,1958.69 ccw(c1469,1972.96) 1483.27,1972.96 1483.27,1973 ccw(c1469,1973) 1469,1987.27 1459.51,1988.44 1453.12,1991.08 1447,1995 1447,2023
  pour cut-out: 1872,4036 cw(c1872,3987) 1921,3987 1921,3986 cw(c1873,3986) 1873,3938 1872,3938 cw(c1872,3987) 1823,3987 1823,3988 cw(c1871,3988) 1871,4036
  pour cut-out: 1672,4036 cw(c1672,3987) 1721,3987 1721,3986 cw(c1673,3986) 1673,3938 1672,3938 cw(c1672,3987) 1623,3987 1623,3988 cw(c1671,3988) 1671,4036
  pour cut-out: 1872,1062 cw(c1872,1013) 1921,1013 1921,1012 cw(c1873,1012) 1873,964 1872,964 cw(c1872,1013) 1823,1013 1823,1014 cw(c1871,1014) 1871,1062
  pour cut-out: 1672,1062 cw(c1672,1013) 1721,1013 1721,1012 cw(c1673,1012) 1673,964 1672,964 cw(c1672,1013) 1623,1013 1623,1014 cw(c1671,1014) 1671,1062
  pour cut-out: 2635,3782 cw(c2670,3782) 2670,3817 cw(c2670,3783) 2704,3783 2704,3704 cw(c2669,3704) 2669,3669 cw(c2669,3703) 2635,3703
  pour cut-out: 2340,3782 cw(c2375,3782) 2375,3817 cw(c2375,3783) 2409,3783 2409,3704 cw(c2374,3704) 2374,3669 cw(c2374,3703) 2340,3703
  pour cut-out: 1432,2442 1380,2442 1380,2436 1361,2436 ccw(c1361,2418) 1343,2418 ccw(c1361,2418) 1361,2400 1380,2400 1380,2394 1432,2394
  pour cut-out: 2669,1183 cw(c2669,1217) 2635,1217 2635,1298 cw(c2669,1298) 2669,1332 cw(c2669,1297) 2704,1297 2704,1217 cw(c2670,1217) 2670,1183
  pour cut-out: 1151,1708 cw(c1151,1681) 1178,1681 cw(c1151,1681) 1151,1654 1128,1654 cw(c1128,1683) 1099,1683 cw(c1124,1683) 1124,1708
  pour cut-out: 2073,1879 ccw(c2073,1897) 2091,1897 ccw(c2073,1897) 2073,1915 ccw(c2073,1897) 2055,1897 ccw(c2073,1897)
  pour cut-out: 1469.29,1954.82 ccw(c1469.29,1972.82) 1487.29,1972.82 ccw(c1469.29,1972.82) 1469.29,1990.82 ccw(c1469.29,1972.82) 1451.29,1972.82 ccw(c1469.29,1972.82)
  pour cut-out: 3072.29,1965.82 ccw(c3072.29,1983.82) 3090.29,1983.82 ccw(c3072.29,1983.82) 3072.29,2001.82 ccw(c3072.29,1983.82) 3054.29,1983.82 ccw(c3072.29,1983.82)
  pour cut-out: 3072.29,1835.82 ccw(c3072.29,1853.82) 3090.29,1853.82 ccw(c3072.29,1853.82) 3072.29,1871.82 ccw(c3072.29,1853.82) 3054.29,1853.82 ccw(c3072.29,1853.82)
  pour cut-out: 3242,3416 3210,3416 3210,3445 3242,3445
  pour cut-out: 4600,4000 4600,3640 4610,3640 4610,4000
  pour cut-out: 4667.64,3398.2 4707.79,3367.09 4679.74,3341.58 4642.81,3377.51
  pour cut-out: 4615,3424 4615,3376 4667,3376 4667,3424 4665,3424
  pour cut-out: 3247,3368 3195,3368 3195,3416 3247,3416
  pour cut-out: 3073,2009 3073,2060 3122,2060 3122,2009
  pour cut-out: 3117,1930 3065,1930 3065,1978 3117,1978
  pour cut-out: 3065,1907 3065,1859 3117,1859 3117,1907
  pour cut-out: 3115,1788 3067,1788 3067,1840 3115,1840
  pour cut-out: 2553,1231 2553,1284 2639,1284 2639,1231
  pour cut-out: 3093.96,3102 3093.97,3054 3144.97,3054 3144.97,3102
  pour cut-out: 2027,1908 2076,1908 2076,1959 2027,1959

## Silkscreen, mask and mechanical layers (free items; w line width, h text height)
Top Overlay:
  circle w10: c2900,1464.69 r5
  region: 2363,1944 2333,1944 2333,1920 2363,1920
  region: 2263,1944 2233,1944 2233,1920 2263,1920
  rectangle: 2333,1696 2363,1720
  rectangle: 2233,1696 2263,1720
  lines w5: 1746,2614 2798,2614 ; 2238,2105 2256,2105 ; 2798,2542 2798,2614 ; 2798,2696 2798,2614 ; 3503,2845 3805,2845 ; 3584,2716 3584,2879 ; 3685,2715 3685,2879 ; 3902,2874 3902,2892
  lines w8: 2247,2052 2247,2116 ; 4045,2883 3891,2883 ; 4262,2190 4470,2190 4480,2200 4480,2210 ; 4262,2818 4468,2818 4480,2806 4480,2793 ; 2247,2116 2262,2101 2232,2101 2247,2116 ; 3891,2883 3906,2868 3906,2898 3891,2883 ; 3499,2715 3805,2715 3805,2879 3499,2879 3499,2715
  text "RST" at 3947,3913 h60
  text "DIT4192" at 3934,3857 h30
  text "XTAL MCLK OUT" at 2058,3669 h35 r90
  text "AES Output" at 2318,3657 h35 r90
  text "MDAT" at 3628.95,3628 h30
  text "MONO" at 3628.95,3578 h30
  text "/Audio" at 3573.96,3528 h30
  text "V bit" at 3613.95,3478 h30
  text "U bit" at 3613.95,3368 h30
  text "DIT4192" at 2683,3353 h30
  text "Chan" at 3628.95,3318 h30
  text "C bit" at 3613.95,3268 h30
  text "L bit" at 3615,3219 h30
  text "CLK1" at 3638.94,3108 h30
  text "9VDC Input" at 4467,3092 h40
  text "CLK0" at 3628.95,3058 h30
  text "M/S" at 3658.94,3008 h30
  text "GND" at 2259,2930 h20 r90
  text "GND" at 2359,2930 h20 r90
  text "BCLK" at 2459,2930 h20 r90
  text "WCLK" at 2559,2930 h20 r90
  text "DATA" at 2659,2930 h20 r90
  text "GND" at 2759,2930 h20 r90
  text "3V3" at 2020.25,2928.77 h20
  text "GND" at 2120.25,2926.77 h20
  text "Switch" at 3914,2891 h20
  text "Set HIGH" at 3915,2855 h20
  text "CLK1" at 3508.12,2851.06 h20
  text "CLK0" at 3596,2851.06 h20
  text "MCLK" at 3717,2851.06 h20
  text "0" at 3534.78,2819.06 h20
  text "0" at 3625.99,2819.06 h20
  text "128fs" at 3710.34,2819.06 h20
  text "0" at 3534.78,2789.06 h20
  text "1" at 3629.32,2789.06 h20
  text "256fs" at 3708.67,2789.06 h20
  text "BLS" at 4267,2768 h30
  text "SPDIF Interface Board" at 1213,2764 h100 r90
  text "1" at 3538.11,2759.06 h20
  text "0" at 3625.99,2759.06 h20
  text "384fs" at 3708.67,2759.06 h20
  text "1" at 3538.11,2730.06 h20
  text "1" at 3629.32,2730.06 h20
  text "512fs" at 3710.34,2730.06 h20
  text "GND" at 2059,2657.99 h20 r90
  text "3V3" at 2159,2657.99 h20 r90
  text "GND" at 2259,2657.99 h20 r90
  text "GND" at 2559,2657.99 h20 r90
  text "GND" at 2659,2657.99 h20 r90
  text "GND" at 2759,2657.99 h20 r90
  text "GND" at 2321.34,2651 h20
  text "GND" at 2421.34,2651 h20
  text "To SPDIF / Transmitter" at 1742,2623 h24
  text "C bit" at 4267,2558 h30
  text "3V3" at 3821.34,2531 h20
  text "GND" at 3921.34,2531 h20
  text "3V3" at 2059,2530 h20 r90
  text "GND" at 2159,2530 h20 r90
  text "MCLK" at 2259,2530 h20 r90
  text "GND" at 2359,2530 h20 r90
  text "BCLK" at 2459,2530 h20 r90
  text "WCLK" at 2559,2530 h20 r90
  text "DATA" at 2659,2530 h20 r90
  text "GND" at 2759,2530 h20 r90
  text "GND" at 3759,2530 h20 r90
  text "From SPDIF / Receiver" at 1746,2523 h24
  text "U bit" at 4267,2488 h30
  text "GND" at 2934.25,2461.77 h20
  text "96KHz" at 4267,2418 h30
  text "GND" at 2934.25,2360.77 h20
  text "RCBL" at 4267,2348 h30
  text "R_Err" at 3616,2296.67 h20
  text "GND" at 2023,2295 h20
  text "C" at 3142,2295 h20
  text "U" at 3242,2295 h20
  text "RCBL" at 3311.35,2295 h20
  text "96K" at 3421.34,2295 h20
  text "/Audio" at 3493.02,2295 h20
  text "3V3" at 2123,2294 h20
  text "R_Err" at 4267,2278 h30
  text "GND" at 2259,2257.99 h20 r90
  text "GND" at 2559,2257.99 h20 r90
  text "GND" at 2659,2257.99 h20 r90
  text "GND" at 2759,2257.99 h20 r90
  text "GND" at 3759,2257.99 h20 r90
  text "3V3" at 3859,2257.99 h20 r90
  text "GND" at 3959,2257.99 h20 r90
  text "GND" at 2321.34,2252 h20
  text "GND" at 2421.34,2252 h20
  text "AES RCVR Status Bits" at 4480,2210 h31 r90
  text "/Audio" at 4267,2208 h30
  text "MCLK / Source" at 2204,1950 h30
  text "CS8416" at 2692.56,1799.33 h30
  text "XTAL" at 2260.5,1597 h25 r90
  text "RMCLK" at 2360.5,1572 h25 r90
  text "RST" at 4006.88,1571.96 h60
  text "CS8416" at 3993.88,1515.96 h30
  text "AES Input" at 2321,1314 h35
  text "RMCLK Out" at 2063,1093 h35 r90
Top Solder:
  circle w20: c1672,3787 r58
  circle w20: c1872,3787 r58
  circle w20: c1872,1213 r58
  circle w20: c1672,1213 r58
  lines w23: 2330.81,1293.15 2330.81,1221.3 ccw(c2372.11,1221.3) 2372.11,1180 ; 2330.81,1293.98 cw(c2372.11,1293.98) 2372.11,1335.27 2379.96,1335.27 ; 2375,1180 2379.96,1180 ; 2377.06,1180 ccw(c2377.06,1221.3) 2418.36,1221.3 2418.36,1293.15 ; 2377.06,1335.27 cw(c2377.06,1293.98) 2418.36,1293.98 ; 2625.81,3779.15 2625.81,3707.3 ccw(c2667.11,3707.3) 2667.11,3666 ; 2625.81,3779.98 cw(c2667.11,3779.98) 2667.11,3821.27 2674.96,3821.27 ; 2670,3666 2674.96,3666 ; 2672.06,3666 ccw(c2672.06,3707.3) 2713.36,3707.3 2713.36,3779.15 ; 2672.06,3821.27 cw(c2672.06,3779.98) 2713.36,3779.98
Bottom Solder:
  lines w15: 1672,3987 1672,3787 1872,3787 1872,3987 ; 1672,1013 1672,1213 1872,1213 1872,1013 1672,1013
Mechanical 1:
  lines w10: 2300,1207 2449,1207 ; 2374.5,1207 2374.5,1357

## Text inside footprints (layer, text, board x,y; h text height)
C4: Top Overlay "+" at 1450,3650.25 h60 r270
C9: Top Overlay "+" at 3226.5,2968 h60
C14: Top Overlay "+" at 3273,2601.5 h60 r90
C15: Top Overlay "+" at 4623.5,2621 h60
C19: Top Overlay "+" at 1817,2428 h60 r270
C24: Top Overlay "+" at 3276.68,1757.3 h60
C27: Top Overlay "+" at 1108,1891 h60 r270
C34: Top Overlay "+" at 3389.5,1511 h60
C35: Top Overlay "+" at 2072,1354 h60 r90
C38: Top Overlay "+" at 4429,1231.5 h60 r90
C39: Top Overlay "+" at 4615.5,1378 h60
J1: Mechanical 13 "Sw Pin" at 2416,3803 h25 r270; Mechanical 13 "Sleeve" at 2592,3964 h25 r180; Mechanical 13 "Sig Pin" at 2604,3819 h25 r270
J8: Mechanical 13 "Sw Pin" at 2628,1197 h25 r90; Mechanical 13 "Sleeve" at 2452,1036 h25; Mechanical 13 "Sig Pin" at 2440,1181 h25 r90